# Altium PCB AA Tone Control.PcbDoc
Units mil, origin at the board's own origin, x right, y up, seen from the top; angles counter-clockwise.
Board outline 2475 x 975 mil, 2 copper layers (Top Layer, Bottom Layer); 28 components, 22 nets, 66 pads, 15 vias.
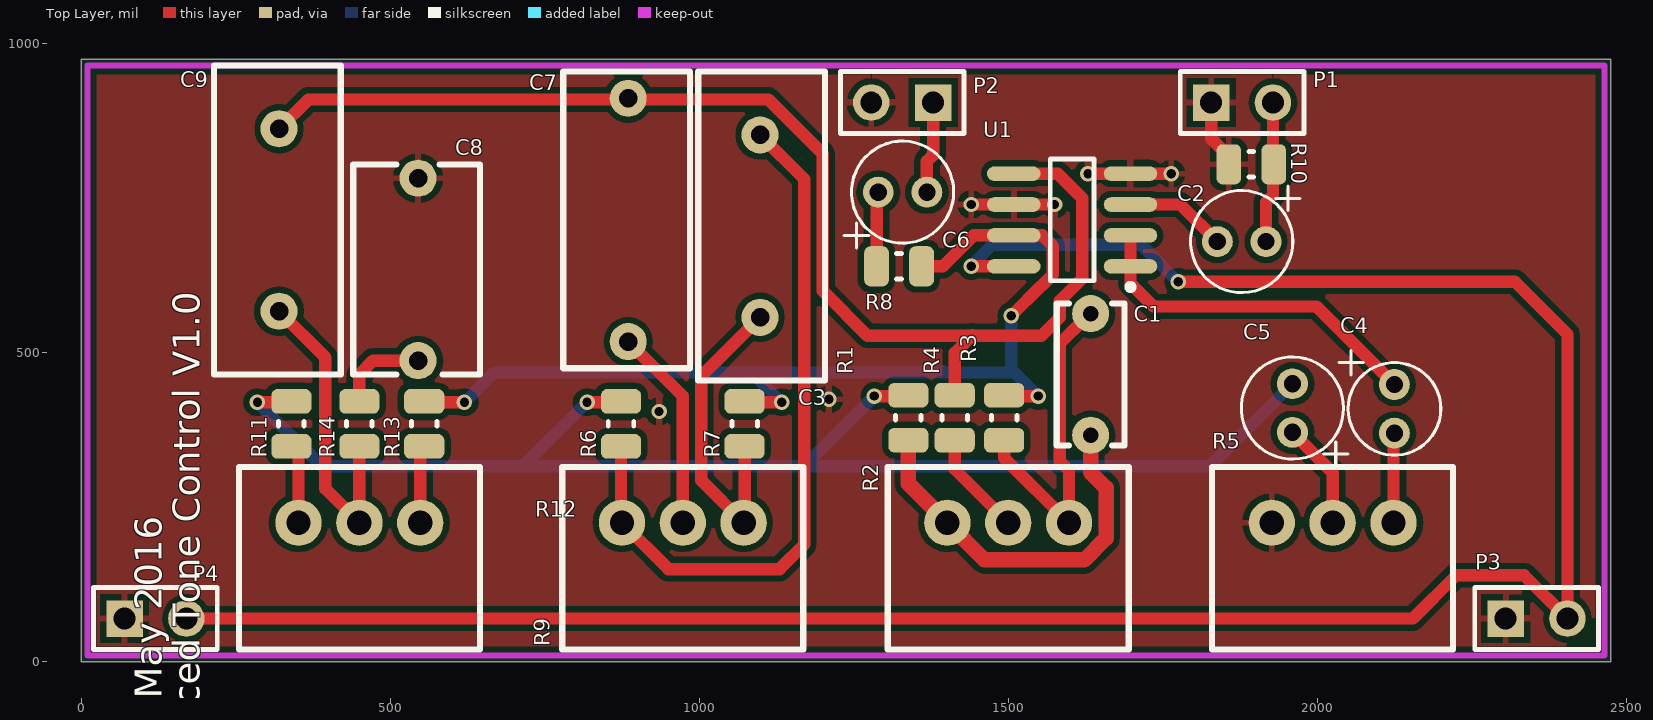
[diagram p0: Top Layer view]
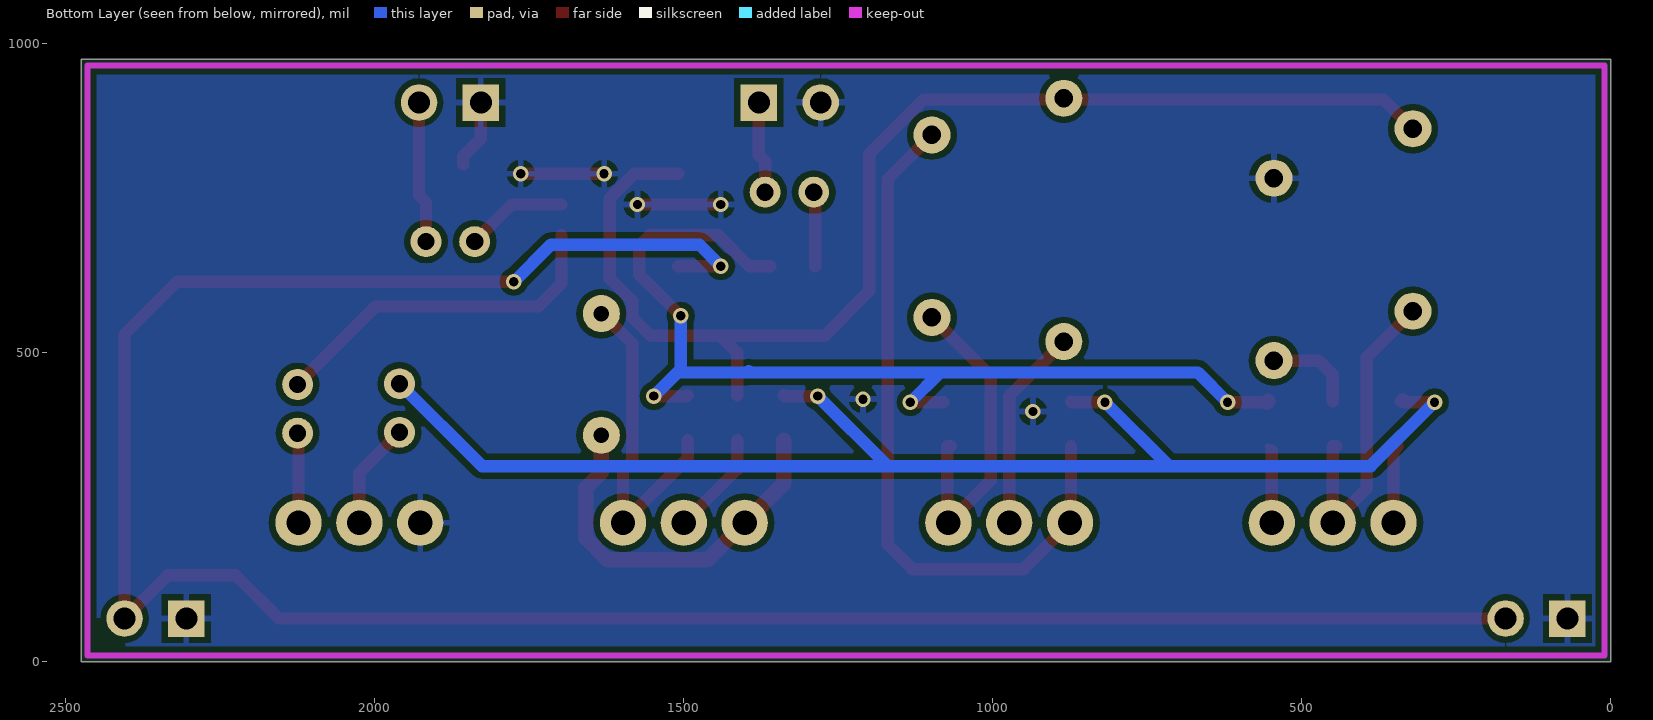
[diagram p1: Bottom Layer view, seen from below]

## Layer stack, top to bottom
Top Solder: solder mask 0.4, Solder Resist, Dk 3.5
Top Layer: signal copper 1.4
Dielectric 1: dielectric 12.6, FR-4, Dk 4.8
Bottom Layer: signal copper 1.4
Bottom Solder: solder mask 0.4, Solder Resist, Dk 3.5

## Board outline
0,0 0,975 2475,975 2475,0

## Design rules (kind name [scope] priority, off if disabled: settings)
Clearance [All] p1: gap=10
PolygonConnect [All] p1: connectstyle=Relief reliefconductorwidth=10 reliefentries=4 polygonreliefangle="90 Angle" airgapwidth=10
RoutingVias [All] p1: holewidth=28 width=50 viastyle="Through Hole" minholewidth=28 minwidth=50 maxholewidth=28 maxwidth=50
SolderMaskExpansion [All] p1: expansion=4
Width [All] p1: maxlimit=50 minlimit=10 preferedwidth=10 minimp=50.000000 maximp=50.000000 favimp=50.000000
30 further rules are at their usual default settings.

## Components (designator, comment, footprint, x,y, rotation, side; value= is the part's Value field where it differs from the comment)
C1 "0.047uF" K473K15X7RF5TH5 1633.43,465 r270 top
C2 "0.1uF" 4X6mmCAP 1838.43,680 r0 top
C3 "4700pF" VY2472M49Y5US63V7 1098.43,705 r90 top
C4 "10uF" "5X12.5mmCAP - GREEN" 2125,370 r90 top
C5 "4.7uF" 4X6mmCAP 1960,450 r270 top
C6 "4.7uF" 4X6mmCAP 1368.43,760 r180 top
C7 "2200pF" VY1222M47Y5UQ63V0 885,715 r270 top
C8 "1000pF" VY2102M29Y5US63V7 545,635 r90 top
C9 "4700pF" VY2472M49Y5US63V7 320,715 r270 top
P1 "Header 2" HDR1X2 1828.43,905 r0 top
P2 "Header 2" HDR1X2 1378.43,905 r180 top
P3 "Header 2" HDR1X2 2305,70 r0 top
P4 "Header 2" HDR1X2 70,70 r0 top
R1 "10K" R0805 1338.43,395 r90 top
R2 "100K" BOURNS_PTD90SERIES_POT 1500,225 r180 top
R3 "10K" R0805 1493.43,395 r270 top
R4 "10K" R0805 1413.43,395 r270 top
R5 "100K" BOURNS_PTD90SERIES_POT 2025,225 r180 top
R6 "3.9K" R0805 873.43,385 r90 top
R7 "3.9K" R0805 1073.43,385 r270 top
R8 "1K" R0805 1323.43,640 r0 top
R9 "100K" BOURNS_PTD90SERIES_POT 973.43,225 r180 top
R10 "1M" R0805 1893.43,805 r0 top
R11 "1.8K" R0805 340,385 r90 top
R12 "100K" BOURNS_PTD90SERIES_POT 450,225 r180 top
R13 "1.8K" R0805 555,385 r270 top
R14 "270r" R0805 450,385 r90 top
U1 "RC4580IDR" SOIC127P600X175-8N 1603.43,715 r180 top

## Footprints (in the part's own frame and the unit in brackets; to place one, negate y for a bottom-side part, rotate by r counter-clockwise, add the part's x,y. Pads: shape width x height; smd on the part's side, far side on the other; paste and mask are expansions set on the pad)
4X6mmCAP [mil]
  round 50 hole 28: 1(78.74,0) 2(0,0)
  silkscreen extent -43,-83 134,90, body extent -39,-79 119,79, height 236
"5X12.5mmCAP - GREEN" [mil]
  round 50 hole 28: 1(78.74,0) 2(0,0)
  silkscreen extent -35,-75 134,90, body extent -35,-75 115,75, height 492
BOURNS_PTD90SERIES_POT [mm] "Bourns Inc PTD90 Series Potentiometers, throughhole right angle PCB MOunted"
  round 1.905 hole 1: 1(-2.5,0) 2(0,0) 3(2.5,0)
  silkscreen extent -4.95,-2.29 4.95,5.21, body extent -4.8,-2.13 4.8,20.02, height 11.2
HDR1X2 [mm] "Connector; Header; 2 Position"
  rect 1.5x1.5 hole 0.9: 1(0,0)
  round 1.5 hole 0.9: 2(2.54,0)
  silkscreen extent -1.27,-1.27 3.81,1.27
K473K15X7RF5TH5 [mil] "K473K15X7RF5TH5 Dipped Ceramic Cap VIshay BC Components"
  round 60 hole 25: 1(-98.43,0) 2(98.43,0)
  silkscreen extent -115,-55 115,55, body extent -108,-49 108,49, height 257
R0805 [mil]
  rrect50% 40x65 smd: 1(-36.42,0) 2(36.42,0)
  silkscreen extent -4,-21 4,21, body extent -43,-28 43,28, height 20
SOIC127P600X175-8N [mm] "SOIC, 8-Leads, Body 4.75x3.90mm, Pitch 1.27mm, IPC Medium Density"
  oval 2.2x0.6 smd: 1(-2.4,1.905) 2(-2.4,0.635) 3(-2.4,-0.635) 4(-2.4,-1.905) 5(2.4,-1.905) 6(2.4,-0.635) 7(2.4,0.635) 8(2.4,1.905)
  silkscreen extent -2.53,-2.5 0.9,2.88, body extent -2,-2.5 2,2.5, height 1.75
VY1222M47Y5UQ63V0 [mil] "VY1222M47Y5UQ63V0 Throughhole Disc Ceramic Capacitor"
  round 60 hole 30: 1(-196.85,0) 2(196.85,0)
  silkscreen extent -240,-105 240,100, body extent -235,-102 235,95, height 651
VY2102M29Y5US63V7 [mil]
  round 60 hole 30: 1(-147.64,0) 2(147.64,0)
  silkscreen extent -170,-100 170,105, body extent -163,-96 163,101, height 1171
VY2472M49Y5US63V7 [mil]
  round 60 hole 30: 1(-147.64,0) 2(147.64,0)
  silkscreen extent -250,-105 250,100, body extent -246,-101 246,96, height 661

## Part data
C1: library part K473K15X7RF5TH5, "0.047µF ±10% 50V X7R Ceramic Capacitor -55°C ~ 125°C Through Hole Radial 0.157\" L x 0.098\" W (4.00mm x 2.50mm)"
C2: library part UMW1H0R1MDD1TP, "CAP ALUM 0.1UF 20% 50V RADIAL"
C3 C9: library part VY2472M49Y5US63V7, "4700pF ±20% 440VAC Y5U (E) Ceramic Capacitor -40°C ~ 125°C Through Hole Radial, Disc 0.492\" Dia (12.50mm)"
C4: library part UES1E100MDM1TD, "CAP ALUM 10UF 20% 25V RADIAL"
C5 C6: library part UMW1V4R7MDD1TP, "CAP ALUM 4.7UF 20% 35V RADIAL"
C7: library part VY1222M47Y5UQ63V0, "2200pF ±20% 760VAC Y5U (E) Ceramic Capacitor -40°C ~ 125°C Through Hole Radial, Disc 0.472\" Dia (12.00mm)"
C8: library part VY2102M29Y5US63V7, "1000pF ±20% 440VAC Y5U (E) Ceramic Capacitor -40°C ~ 125°C Through Hole Radial, Disc 0.295\" Dia (7.50mm)"
P1 P2 P3 P4: "Header, 2-Pin"
R1 R3 R4: library part ERJ-6ENF1002V, "RES SMD 10K OHM 1% 1/8W 0805"
R2 R5 R9 R12: library part PTD901-2015K-B104, "POT 100K OHM 1/20W CARBON LINEAR"
R6 R7: library part RC2012F392CS, "RES SMD 3.9K OHM 1% 1/8W 0805"
R8: library part RC2012F102CS, "RES SMD 1K OHM 1% 1/8W 0805"
R10: library part RC2012J105CS, "RES SMD 1M OHM 5% 1/8W 0805"
R11 R13: library part RC2012F182CS, "RES SMD 1.8K OHM 1% 1/8W 0805"
R14: library part RC2012F271CS, "RES SMD 270 OHM 1% 1/8W 0805"
U1: "IC OPAMP AUDIO 12MHZ 8SOIC Low Noise, High Performance, High Fidelity Dual Audio Operational Amplifier, 8-pin Narrow SOIC"

## Via types
v1: diameter 25, hole 15, Top Layer to Bottom Layer, 15 vias

## Nets (pads, with @x,y where several pads share a name; then routed paths per layer and width w, separated by ;. In a path a pad name is that pad's centre, name@x,y a point inside that pad or via, vN(x,y) a via of type N, cw(c..) or ccw(c..) an arc to the next point about the centre after c; other vN are vias at no path point)
9VCC: P3.2 P4.2 U1.8 | length 3861.5
  Top Layer w20: P4.2 2155,70 2225,140 2335,140 P3.2 2405,530 2320,615 v1(1775,615) ; v1(1440,640) U1.8
  Bottom Layer w20: v1(1440,640) 1475,675 1715,675 v1(1775,615)
GND: C8.2 P1.1 P2.2 P3.1 P4.1 R5.3 R10.1 U1.4 U1.6 | length 381.8
  Top Layer w20: v1(1440,740) U1.6 v1(1575,740) ; v1(1628.98,790) U1.4 v1(1763.98,790) ; P1.1 1828.43,846.57 1857.01,817.99 R10.1
  other v1: 935,405 1210,425
NetC1_1: C1.1 R2.1 R3.2 | length 538.3
  Top Layer w20: R3.2 1493.43,330 R2.1 1598.43,310 1583.43,325 1583.43,515 1623.43,555 C1.1@1623.43,563.43
NetC1_2: C1.2 R1.1 R2.3 | length 632.8
  Top Layer w25: R1.1 1338.43,288.15 R2.3 1461.57,165 1623.28,165 1658.43,200.15 1658.43,281.57 1633.43,306.57 C1.2
NetC2_1: C2.1 P1.2 R10.2 | length 229.7
  Top Layer w20: C2.1 1917.17,743.74 1928.43,755 P1.2
NetC2_2: C2.2 U1.3 | length 165.4
  Top Layer w20: U1.3 1778.43,740 C2.2
NetC3_1: C3.1 R7.2 R9.1 | length 529.9
  Top Layer w20: R7.2@1067.8,348.58 R7.2 1073.43,226.57 R9.1 1003.43,293.43 1003.43,462.36 C3.1
NetC3_2: C3.2 R6.1 R9.3 | length 1156.9
  Top Layer w20: R9.3@873.43,226.57 R6.1 ; R9.3 950,150 1130,150 1170,190 1170,781.06 C3.2
NetC4_1: C4.1 U1.1 U1.2 | length 572.7
  Top Layer w20: U1.2 U1.1 1697.91,612.09 1735,575 1998.74,575 C4.1
NetC4_2: C4.2 R5.1 | length 145.7
  Top Layer w20: R5.1 2123.43,368.43 C4.2
NetC5_1: C5.1 R5.2 | length 173.2
  Top Layer w20: C5.1 2025,306.26 R5.2
NetC5_2: C5.2 R1.2 R6.2 R11.2 | length 2249.5
  Top Layer w20: v1(285,420) 331.42,420 336.42,425 R11.2 ; v1(818.43,420) 872.01,420 R6.2 ; v1(1283.43,430) 1337.01,430 R1.2
  Bottom Layer w20: v1(285,420) 388.43,316.57 715,316.57 ; v1(818.43,420) 715,316.57 ; v1(1283.43,430) 1170,316.57 ; C5.2 1826.57,316.57 1170,316.57 ; 715,316.57 1170,316.57
NetC6_1: C6.1 R8.1 | length 121.1
  Top Layer w20: R8.1 1287.01,757.32 C6.1
NetC6_2: C6.2 P2.1 | length 149.1
  Top Layer w20: C6.2 1368.43,810 1378.43,820 P2.1
NetC7_1: C7.1 C9.1 R4.1 U1.5 | length 2040.9
  Top Layer w20: C9.1 367.36,910 1111.77,910 1200,821.77 1200,600 1272.5,527.5 1553.5,527.5 1583.43,557.43 1583.43,584.14 1620,620.71 1620,750 1580,790 U1.5 ; C7.1@883.43,896.85 C7.1@883.43,910 ; R4.1 1413.43,500 1441.71,528.29
NetC7_2: C7.2 R9.2 | length 334.2
  Top Layer w20: C7.2 973.43,429.72 R9.2
  Bottom Layer w20: C7.2 886.85,518.15 C7.2@885,520
NetC8_1: C8.1 R14.2 | length 147.8
  Top Layer w20: R14.2 450,465 472.36,487.36 C8.1
NetC9_2: C9.2 R12.2 R14.1 | length 525.4
  Top Layer w20: C9.2 395,492.36 395,280 R12.2 R14.1 R14.1@444.37,348.58
NetR2_2: R2.2 R4.2 | length 169.4
  Top Layer w20: R4.2 1413.43,311.57 R2.2
NetR3_1: R3.1 R7.1 R8.2 R13.1 U1.7 | length 1684.7
  Top Layer w20: R13.1@556.42,420 v1(620,420) ; R7.1@1080,420 v1(1133.58,420) ; R8.2 1394.04,640 1444.04,690 U1.7 1555,690 1572.24,672.76 1572.24,626.82 1553.61,608.19 1553.19,608.19 v1(1505,560) ; R3.1 1494.84,430 v1(1548.43,430)
  Top Layer w25: R13.1 R13.1@556.42,420
  Bottom Layer w20: v1(620,420) 668.15,468.15 1085.43,468.15 ; v1(1133.58,420) 1085.43,468.15 ; 1395,470 1396.85,468.15 ; v1(1505,560) 1505,473.15 1510,468.15 ; v1(1548.43,430) 1510.28,468.15 1085.43,468.15
NetR11_1: R11.1 R12.3 | length 126.3
  Top Layer w20: R11.1@345,348.58 351.57,342.01 R12.3
NetR12_1: R12.1 R13.2 | length 126.3
  Top Layer w10: R13.2@548.43,342.01 R13.2
  Top Layer w20: R12.1 R13.2@548.43,342.01

## Polygon pours and split planes (outlines as drawn)
GND on Bottom Layer "Ground-Plane" (solid, remove dead copper, pour order 2): 10,965 10,10 2465,10 2465,960 2465,965
GND on Top Layer "Ground-Plane" (solid, remove dead copper, pour order 4): 10,965 10,10 2465,10 2465,965

## Keep-outs
Keep-Out Layer:
  lines w10: 10,10 10,965 2465,965 2465,10 10,10

## Silkscreen, mask and mechanical layers (free items; w line width, h text height)
Top Overlay:
  text "Advanced Tone Control V1.0" at 206.39,-260 h75 r90
  text "adamjvr May 2016" at 145,-325 h75 r90
Mechanical 15:
  the board outline again, w10